# EAGLE board Rangkaian 1 (EAGLE 7.3.0)
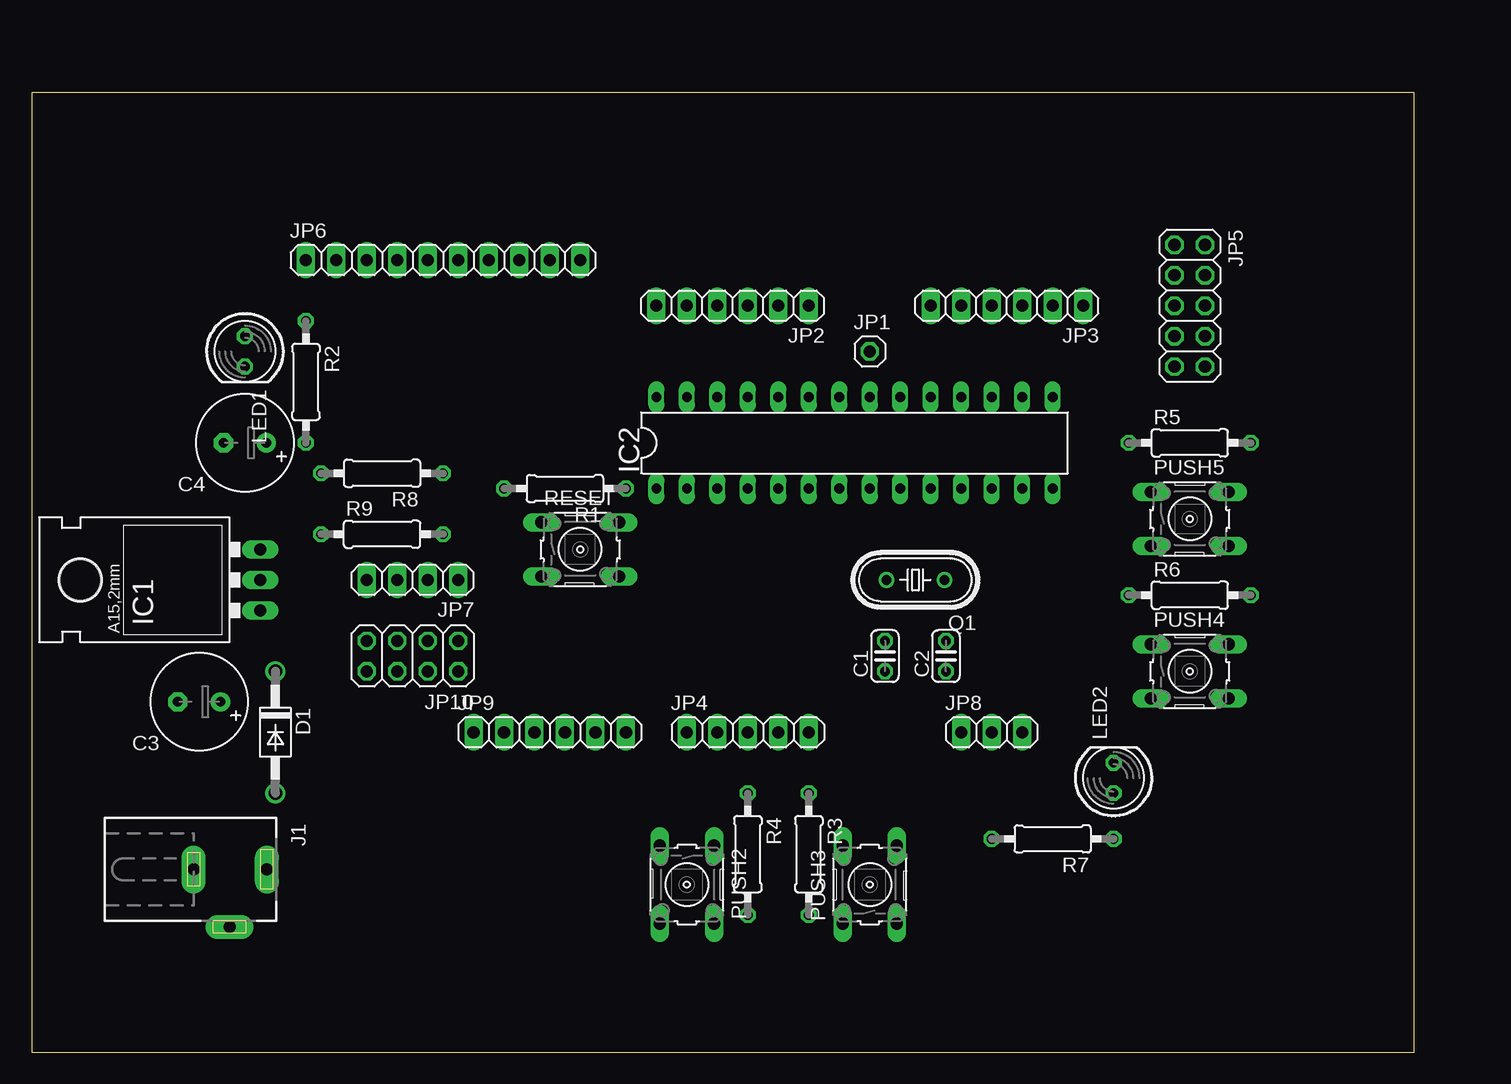
[diagram p0: board, top side]
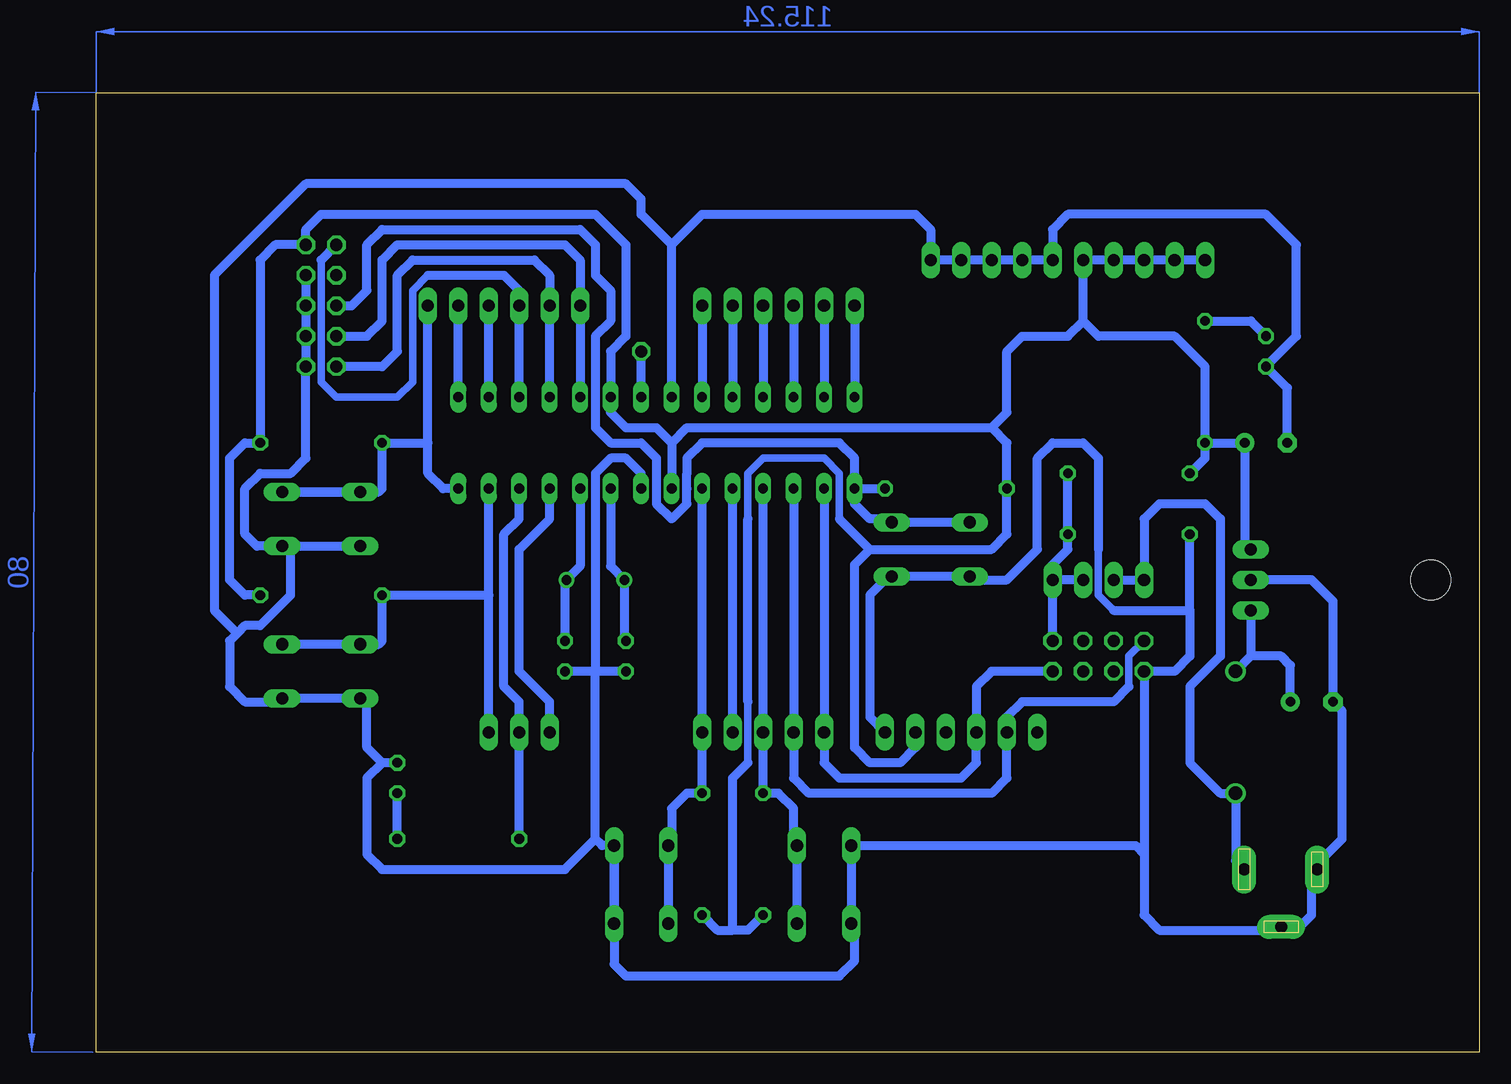
[diagram p1: board, bottom side, seen from below]

Size 115.24 x 80 mm. Coordinates in mm from the lower left corner, seen from the top.
Outline: 0,0 115.24,0 115.24,80 0,80 0,0
Copper layers (1*16): Top 0.035mm / dielectric 1.5mm / Bottom 0.035mm
Design rules "default": minimum track width 10mil, minimum drill 24mil, track to track 8mil, track to pad 8mil, pad to pad 8mil, via to via 8mil, smd to smd 8mil, copper to edge 40mil, drill to drill 8mil, minimum pad ring 10mil, minimum via ring 8mil, stop-mask expansion 4mil, vias tented up to drill 0mil, thermal gap 10mil

## Footprints (pad centres in the part's own frame; a part is rotated, then mirrored left to right if it is on the bottom)
C025-024X044 = drill 0.813 octagon: 1 -1.27,0; 2 1.27,0
E3,5-8 = drill 0.813 pad 1.6: + -1.778,0 | drill 0.813 pad 1.6 octagon: - 1.778,0
DO41-10 = drill 1.118: A 5.08,0; C -5.08,0
78XXL = drill 1.016 long: GND 0,-3.81; IN -2.54,-3.81; OUT 2.54,-3.81 | hole 3.302: 0,11.176
DIL28-3 = drill 0.813 long: 1 -16.51,-3.81; 2 -13.97,-3.81; 3 -11.43,-3.81; 4 -8.89,-3.81; 5 -6.35,-3.81; 6 -3.81,-3.81; 7 -1.27,-3.81; 8 1.27,-3.81; 9 3.81,-3.81; 10 6.35,-3.81; 11 8.89,-3.81; 12 11.43,-3.81; 13 13.97,-3.81; 14 16.51,-3.81; 15 16.51,3.81; 16 13.97,3.81; 17 11.43,3.81; 18 8.89,3.81; 19 6.35,3.81; 20 3.81,3.81; 21 1.27,3.81; 22 -1.27,3.81; 23 -3.81,3.81; 24 -6.35,3.81; 25 -8.89,3.81; 26 -11.43,3.81; 27 -13.97,3.81; 28 -16.51,3.81
DCJ0202 = drill 1 pad 2 long: 1 0,3.1; 2 4.8,0; 3 0,-3
1X01 = drill 1.016 octagon: 1 0,0
1X06 = drill 1.016 long: 1 -6.35,0; 2 -3.81,0; 3 -1.27,0; 4 1.27,0; 5 3.81,0; 6 6.35,0
1X05 = drill 1.016 long: 1 -5.08,0; 2 -2.54,0; 3 0,0; 4 2.54,0; 5 5.08,0
2X05 = drill 1.016 octagon: 1 -5.08,-1.27; 2 -5.08,1.27; 3 -2.54,-1.27; 4 -2.54,1.27; 5 0,-1.27; 6 0,1.27; 7 2.54,-1.27; 8 2.54,1.27; 9 5.08,-1.27; 10 5.08,1.27
1X10 = drill 1.016 long: 1 -11.43,0; 2 -8.89,0; 3 -6.35,0; 4 -3.81,0; 5 -1.27,0; 6 1.27,0; 7 3.81,0; 8 6.35,0; 9 8.89,0; 10 11.43,0
1X04 = drill 1.016 long: 1 -3.81,0; 2 -1.27,0; 3 1.27,0; 4 3.81,0
1X03 = drill 1.016 long: 1 -2.54,0; 2 0,0; 3 2.54,0
2X04 = drill 1.016 octagon: 1 -3.81,-1.27; 2 -3.81,1.27; 3 -1.27,-1.27; 4 -1.27,1.27; 5 1.27,-1.27; 6 1.27,1.27; 7 3.81,-1.27; 8 3.81,1.27
LED5MM = drill 0.813 octagon: A -1.27,0; K 1.27,0
B3F-10XX = drill 1.016 long: 1 -3.251,2.261; 2 3.251,2.261; 3 -3.251,-2.261; 4 3.251,-2.261
HC49U-V = drill 0.813: 1 -2.413,0; 2 2.413,0
0207/10 = drill 0.813 octagon: 1 -5.08,0; 2 5.08,0

## Placement (x,y rotation side)
C1  [C025-024X044]  71.12,33.02 90 top
C2  [C025-024X044]  76.2,33.02 90 top
C3  [E3,5-8]  13.97,29.21 180 top
C4  [E3,5-8]  17.78,50.8 180 top
D1  1N4004  [DO41-10]  20.32,26.67 270 top
IC1  [78XXL]  15.24,39.37 90 top
IC2  ATMEGA328-20P  [DIL28-3]  68.58,50.8 0 top
J1  DCJ0202  [DCJ0202]  16.51,15.24 270 top
JP1  [1X01]  69.85,58.42 0 top
JP2  [1X06]  58.42,62.23 180 top
JP3  [1X06]  81.28,62.23 180 top
JP4  [1X05]  59.69,26.67 0 top
JP5  [2X05]  96.52,62.23 270 top
JP6  [1X10]  34.29,66.04 0 top
JP7  [1X04]  31.75,39.37 180 top
JP8  [1X03]  80.01,26.67 0 top
JP9  [1X06]  43.18,26.67 0 top
JP10  [2X04]  31.75,33.02 180 top
LED1  [LED5MM]  17.78,58.42 270 top
LED2  [LED5MM]  90.17,22.86 90 top
PUSH2  [B3F-10XX]  54.61,13.97 270 top
PUSH3  [B3F-10XX]  69.85,13.97 90 top
PUSH4  [B3F-10XX]  96.52,31.75 0 top
PUSH5  [B3F-10XX]  96.52,44.45 0 top
Q1  [HC49U-V]  73.66,39.37 180 top
R1  [0207/10]  44.45,46.99 180 top
R2  [0207/10]  22.86,55.88 270 top
R3  1k  [0207/10]  64.77,16.51 270 top
R4  1k  [0207/10]  59.69,16.51 270 top
R5  1k  [0207/10]  96.52,50.8 0 top
R6  1k  [0207/10]  96.52,38.1 0 top
R7  1k  [0207/10]  85.09,17.78 180 top
R8  220  [0207/10]  29.21,48.26 180 top
R9  330  [0207/10]  29.21,43.18 0 top
RESET  [B3F-10XX]  45.72,41.91 0 top

## Library data of the parts
C1 C2 R1-R9 = resistor
C3 C4 = rcl
D1 = diode
IC1 = v-reg
IC2 = atmega328
J1 = con-jack; OC_FARNELL: unknown; OC_NEWARK: unknown
JP1-JP10 = pinhead
LED1 LED2 = led
PUSH2-PUSH5 RESET = switch-omron; MPN: B3F-1000; OC_FARNELL: 176432; OC_NEWARK: 36M3542
Q1 = crystal; OC_FARNELL: 1666969; OC_NEWARK: unknown

## Nets
3,3V: JP7.1 JP7.2 JP10.1 R8.1 R9.2
12V: D1.A J1.1 JP7.3 JP7.4
GND: C1.1 C2.1 C3.- C4.- IC1.GND IC2.8 IC2.22 J1.2 J1.3 JP5.4 JP5.6 JP5.8 JP5.10 JP6.6 JP6.7 JP6.8 JP6.9 JP6.10 JP9.6 JP10.8 LED1.K LED2.K PUSH2.3 PUSH2.4 PUSH3.3 PUSH3.4 PUSH4.3 PUSH4.4 PUSH5.3 PUSH5.4 R9.1 RESET.3 RESET.4
LED: IC2.12 JP8.2 R7.2
N$1: C1.2 IC2.9 Q1.2
N$2: C2.2 IC2.10 Q1.1
N$3: IC2.1 JP5.5 R1.1 RESET.1 RESET.2
N$4: IC2.21 JP1.1
N$5: IC2.27 JP2.5
N$6: IC2.23 JP2.1
N$7: IC2.24 JP2.2
N$8: IC2.25 JP2.3
N$9: IC2.26 JP2.4
N$10: IC2.28 JP2.6
N$13: IC2.18 JP3.5 JP5.9
N$14: IC2.5 JP4.4
N$15: IC2.19 JP3.6 JP5.7
N$16: IC2.11 JP8.1
N$17: IC2.17 JP3.4 JP5.1
N$19: LED2.A R7.1
N$20: IC2.15 JP3.2
N$21: IC2.16 JP3.3
N$26: C3.+ D1.C IC1.IN
N$27: JP9.1
N$28: LED1.A R2.1
N$31: JP9.4
N$35: JP10.3
N$36: JP10.5
N$39: JP10.4
N$40: JP10.6
PUSH1: IC2.4 JP4.3 PUSH2.1 PUSH2.2 R4.1
PUSH2: IC2.6 JP4.5 PUSH3.1 PUSH3.2 R3.1
PUSH3: IC2.13 JP8.3 PUSH4.1 PUSH4.2 R6.1
PUSH4: IC2.14 JP3.1 PUSH5.1 PUSH5.2 R5.1
RXD: IC2.2 JP4.1 JP9.3 JP10.2
TXD: IC2.3 JP4.2 JP9.2 JP10.7
VCC: C4.+ IC1.OUT IC2.7 IC2.20 JP5.2 JP6.1 JP6.2 JP6.3 JP6.4 JP6.5 JP9.5 R1.2 R2.2 R3.2 R4.2 R5.2 R6.2 R8.2

## Tracks (layer width: path | path; a pad name or v marks a point on that pad's centre or on a via)
3,3V
  Bottom 0.762: JP7.2 JP7.1 | JP7.1 35.56,40.64 34.29,41.91 R9.2 R8.1 | JP10.1 JP7.1
12V
  Bottom 0.762: JP7.3 JP7.4 27.94,44.45 26.67,45.72 22.86,45.72 21.59,44.45 21.59,33.02 24.13,30.48 24.13,24.13 21.59,21.59 D1.A 20.32,15.95 J1.1
GND
  Bottom 0.61: 31.75,41.91 31.75,38.1 30.48,36.83
  Bottom 0.762: C1.1 73.66,31.75 | 73.66,31.75 C2.1 | IC2.8 69.85,48.26 71.12,49.53 72.39,49.53 73.66,48.26 73.66,31.75 | JP5.4 JP5.6 JP5.8 JP5.10 97.79,49.53 99.06,48.26 101.6,48.26 102.87,46.99 102.87,43.18 101.88,42.19 PUSH5.4 99.06,42.19 | 99.06,42.19 PUSH5.3 | 99.06,42.19 99.06,38.1 101.6,35.56 102.87,35.56 103.5,34.92 | 103.5,34.92 104.14,34.29 104.14,30.48 102.87,29.21 100.05,29.21 PUSH4.4 PUSH4.3 92.71,28.93 92.71,25.4 91.44,24.13 | LED2.K 91.44,24.13 | 91.44,24.13 92.71,22.86 92.71,16.51 91.44,15.24 76.2,15.24 73.66,17.78 | 73.66,17.78 73.66,31.75 | 67.31,67.31 64.77,69.85 46.99,69.85 45.72,68.58 JP6.10 JP6.9 JP6.8 JP6.7 JP6.6 35.56,68.58 34.29,69.85 17.78,69.85 15.24,67.31 15.24,59.69 LED1.K 16,55.37 C4.- | PUSH3.3 PUSH3.4 | PUSH2.3 PUSH2.4 52.07,10.44 52.07,7.62 53.34,6.35 71.12,6.35 72.11,7.34 PUSH3.4 | PUSH2.3 52.35,16.79 52.07,16.51 | PUSH3.4 73.1,17.22 73.66,17.78 | JP9.6 50.8,27.94 50.8,38.1 49.53,39.37 49.25,39.37 RESET.4 RESET.3 42.9,39.65 43.18,39.37 39.37,39.37 36.83,41.91 36.83,49.53 35.56,50.8 33.02,50.8 31.75,49.53 31.75,41.91 | 24.13,36.83 R9.1 | 30.48,36.83 24.13,36.83 | IC1.GND 13.97,39.37 12.19,37.59 C3.- 11.43,28.45 11.43,17.78 13.51,15.7 J1.3 13.97,14.78 13.97,11.43 14.96,10.44 J1.2 16.79,10.16 26.67,10.16 27.94,11.43 27.94,16.51 | 24.13,36.83 24.13,33.02 25.4,31.75 JP10.8 27.94,16.51 | PUSH2.3 28.65,17.22 27.94,16.51 | IC2.22 67.31,67.31 | 67.31,67.31 69.85,69.85 69.85,71.12 71.12,72.39 97.79,72.39 105.41,64.77 105.41,36.83 103.5,34.92
LED
  Bottom 0.762: IC2.12 80.01,44.45 81.28,43.18 81.28,30.48 80.01,29.21 JP8.2 R7.2
N$1
  Bottom 0.762: IC2.9 72.39,40.51 Q1.2 71.25,34.42 C1.2
N$2
  Bottom 0.762: IC2.10 74.93,40.51 Q1.1 76.2,39.37 C2.2
N$3
  Bottom 0.762: JP5.5 93.98,62.23 92.71,63.5 92.71,67.31 91.44,68.58 74.93,68.58 73.66,67.31 73.66,64.77 72.39,63.5 72.39,60.96 73.66,59.69 73.66,52.07 72.39,50.8 69.85,50.8 68.58,49.53 68.58,45.72 67.31,44.45 66.04,45.72 66.04,46.99 66.04,48.26 66.04,49.53 64.77,50.8 53.34,50.8 52.07,49.53 IC2.1 | 49.53,44.45 49.25,44.45 RESET.2 | RESET.2 49.25,44.17 49.53,44.45 | 49.53,44.45 50.8,44.45 52.07,45.72 IC2.1 | IC2.1 R1.1 | RESET.1 RESET.2
N$4
  Bottom 0.762: IC2.21 JP1.1
N$5
  Bottom 0.762: JP2.5 IC2.27
N$6
  Bottom 0.762: JP2.1 IC2.23
N$7
  Bottom 0.762: JP2.2 IC2.24
N$8
  Bottom 0.762: JP2.3 IC2.25
N$9
  Bottom 0.762: JP2.4 IC2.26
N$10
  Bottom 0.762: JP2.6 IC2.28
N$13
  Bottom 0.762: IC2.18 JP3.5 77.47,64.77 78.74,66.04 88.9,66.04 90.17,64.77 90.17,58.42 91.44,57.15 JP5.9
N$14
  Bottom 0.762: JP4.4 IC2.5
N$15
  Bottom 0.762: IC2.19 JP3.6 74.93,66.04 76.2,67.31 90.17,67.31 91.44,66.04 91.44,60.96 92.71,59.69 JP5.7
N$16
  Bottom 0.762: JP8.1 77.47,29.21 80.01,31.75 80.01,41.91 77.47,44.45 IC2.11
N$17
  Bottom 0.61: 96.52,66.04 96.52,55.88 95.25,54.61 90.17,54.61 88.9,55.88 88.9,63.5 87.63,64.77
  Bottom 0.762: IC2.17 JP3.4 80.01,63.5 81.28,64.77 87.63,64.77 | JP5.1 96.52,66.04
N$19
  Bottom 0.762: R7.1 LED2.A
N$20
  Bottom 0.762: IC2.15 JP3.2
N$21
  Bottom 0.762: IC2.16 JP3.3
N$26
  Bottom 0.762: IC1.IN 19.05,33.02 | 19.05,33.02 D1.C | C3.+ 15.75,32.26 16.51,33.02 19.05,33.02
N$28
  Bottom 0.762: R2.1 19.05,60.96 LED1.A
PUSH1
  Bottom 0.762: IC2.4 JP4.3 R4.1 58.42,21.59 57.15,20.32 57.15,17.5 PUSH2.1 PUSH2.2
PUSH2
  Bottom 0.762: IC2.6 JP4.5 R3.1 66.04,21.59 67.31,20.32 67.31,17.5 PUSH3.2 PUSH3.1
PUSH3
  Bottom 0.762: JP8.3 82.55,38.1 | 82.55,38.1 IC2.13 | PUSH4.2 PUSH4.1 91.72,34.01 91.44,34.29 R6.1 82.55,38.1
PUSH4
  Bottom 0.762: IC2.14 86.36,46.99 87.63,48.26 87.63,50.8 | 87.63,50.8 JP3.1 | PUSH5.1 PUSH5.2 91.72,46.71 91.44,46.99 R5.1 87.63,50.8
RXD
  Bottom 0.762: IC2.2 JP4.1 54.61,24.13 53.34,22.86 43.18,22.86 41.91,24.13 JP9.3 | 41.91,25.4 JP9.3 | JP10.2 40.64,31.75 41.91,30.48 JP9.3
TXD
  Bottom 0.61: 29.21,30.48 29.21,33.02 JP10.7
  Bottom 0.762: IC2.3 JP4.2 57.15,22.86 55.88,21.59 40.64,21.59 39.37,22.86 JP9.2 39.37,27.94 38.1,29.21 30.48,29.21 29.21,30.48
VCC
  Bottom 0.61: 60.96,24.13 60.96,29.21 | 60.96,44.45 60.96,48.26 59.69,49.53 54.61,49.53 53.34,48.26 53.34,44.45
  Bottom 0.762: 67.31,50.8 68.58,52.07 71.12,52.07 72.39,53.34 IC2.20 72.39,58.42 71.12,59.69 71.12,67.31 73.66,69.85 96.52,69.85 97.79,68.58 JP5.2 100.33,67.31 101.6,66.04 R5.2 102.87,50.8 104.14,49.53 104.14,39.37 102.87,38.1 R6.2 | 67.31,50.8 IC2.7 | JP6.1 JP6.2 JP6.3 JP6.4 JP6.5 33.02,60.96 | 33.02,60.96 34.29,59.69 38.1,59.69 39.37,58.42 39.37,53.34 40.64,52.07 | R3.2 63.5,10.16 62.23,10.16 | R4.2 60.96,10.16 62.23,10.16 | JP9.5 46.99,25.4 48.26,24.13 50.8,24.13 52.07,25.4 52.07,40.64 50.8,41.91 | 50.8,41.91 40.64,41.91 39.37,43.18 R1.2 39.37,50.8 40.64,52.07 | R2.2 C4.+ 19.56,42.42 IC1.OUT | R8.2 22.86,49.53 R2.2 | R2.2 22.86,57.15 25.4,59.69 31.75,59.69 33.02,60.96 | 67.31,50.8 66.04,52.07 40.64,52.07 | 62.23,10.16 62.23,22.86 60.96,24.13 | 60.96,29.21 60.96,44.45 | 53.34,44.45 50.8,41.91
(copper drawn outside any net)
  shapes: Bottom area x2